# Altium PCB PolarizacionBJT_2.PcbDoc
Units mm, origin at the board's own origin, x right, y up, seen from the top; angles counter-clockwise.
Board outline 100 x 100 mm, 2 copper layers (Top Layer, Bottom Layer); 20 components, 7 nets, 43 pads, 0 vias.
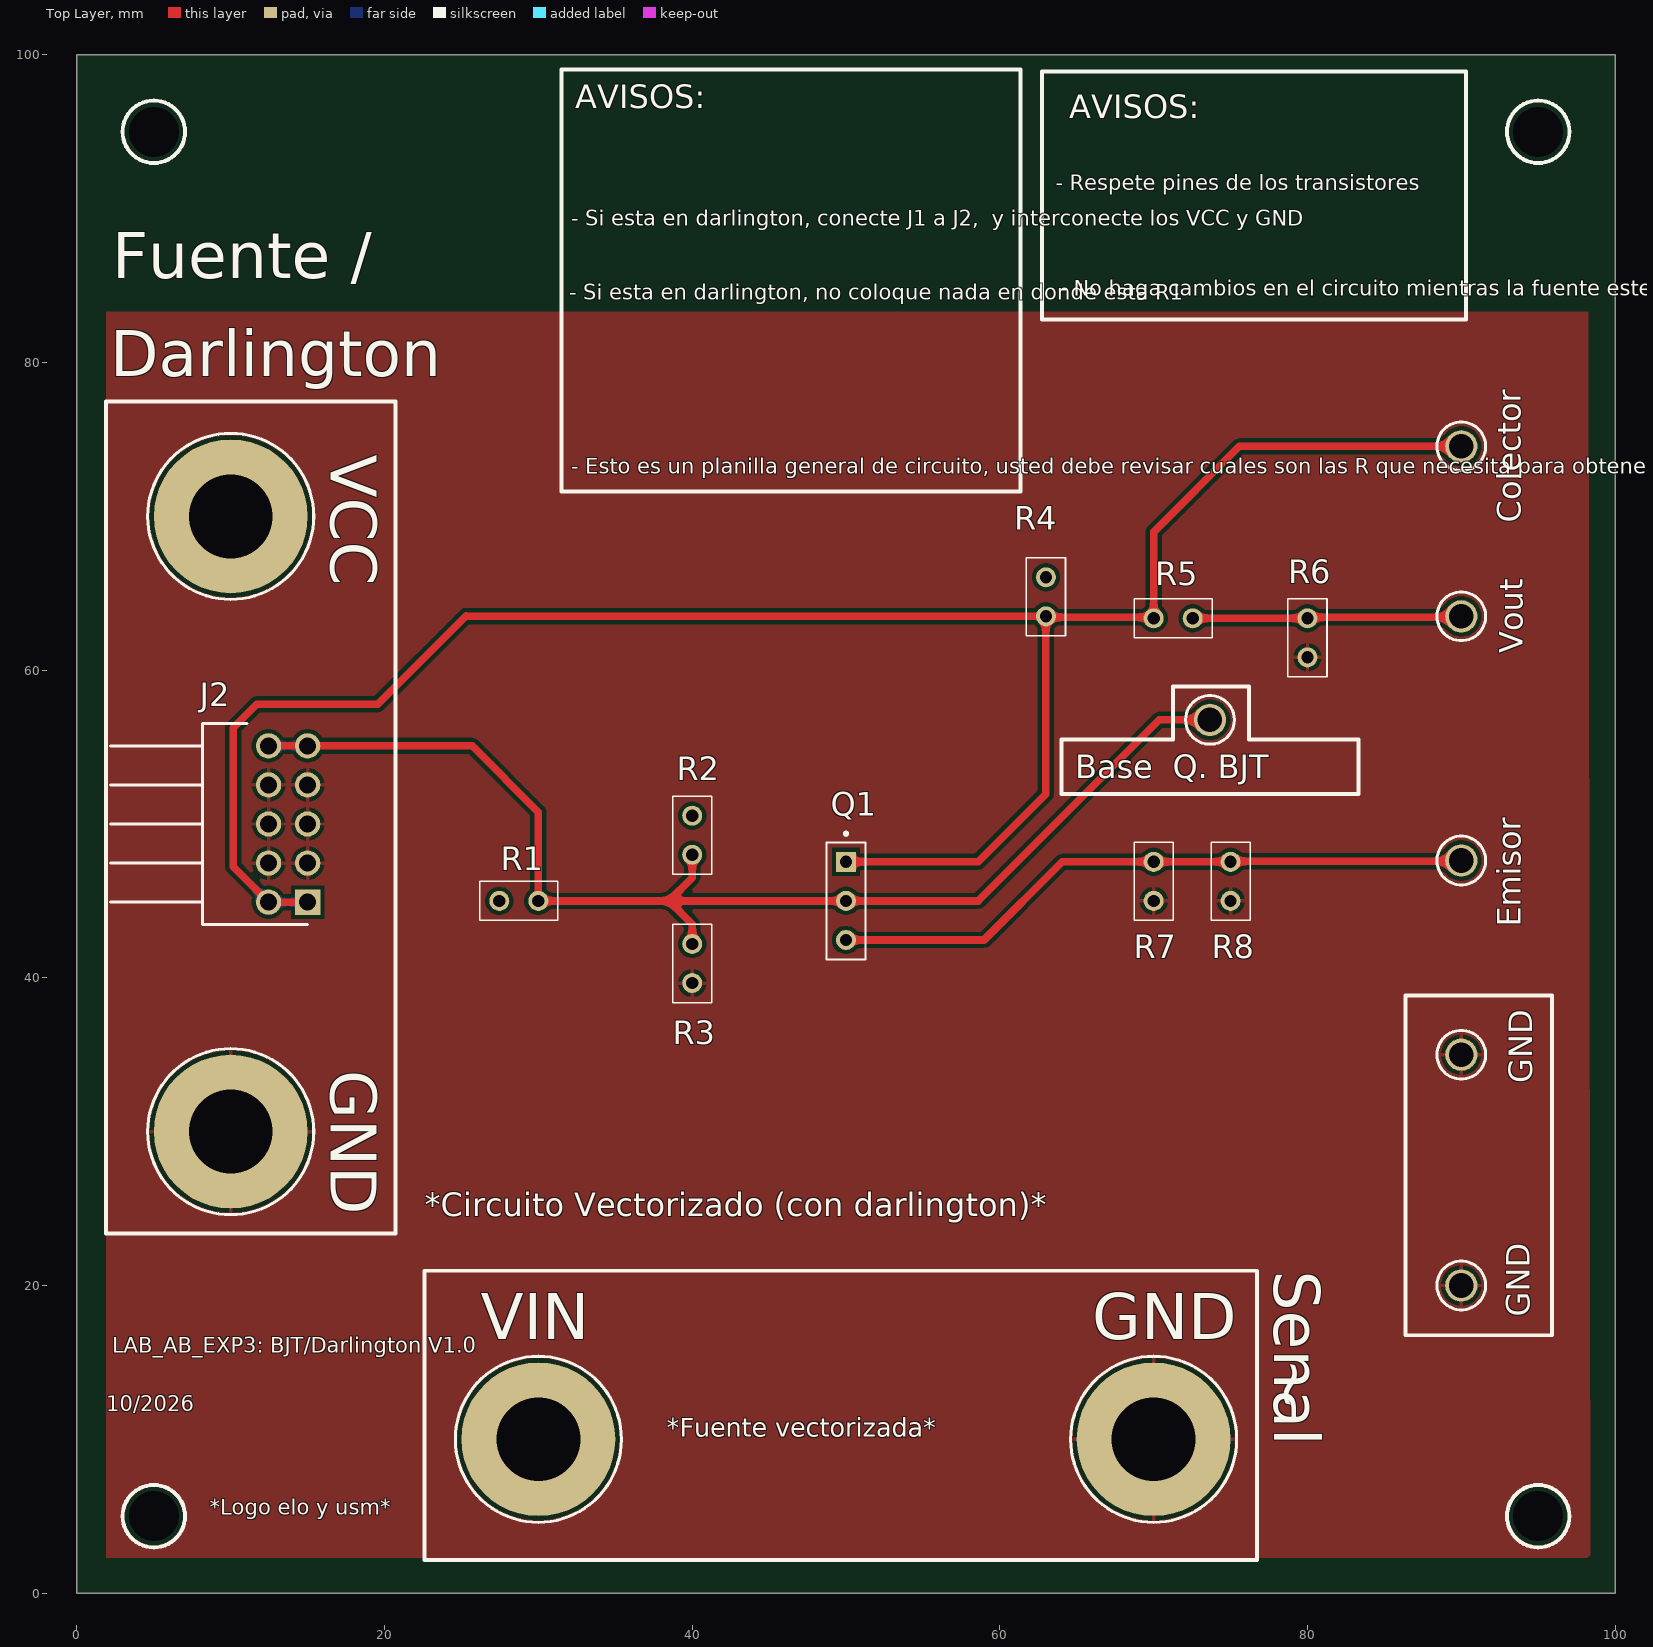
[diagram p0: Top Layer view]
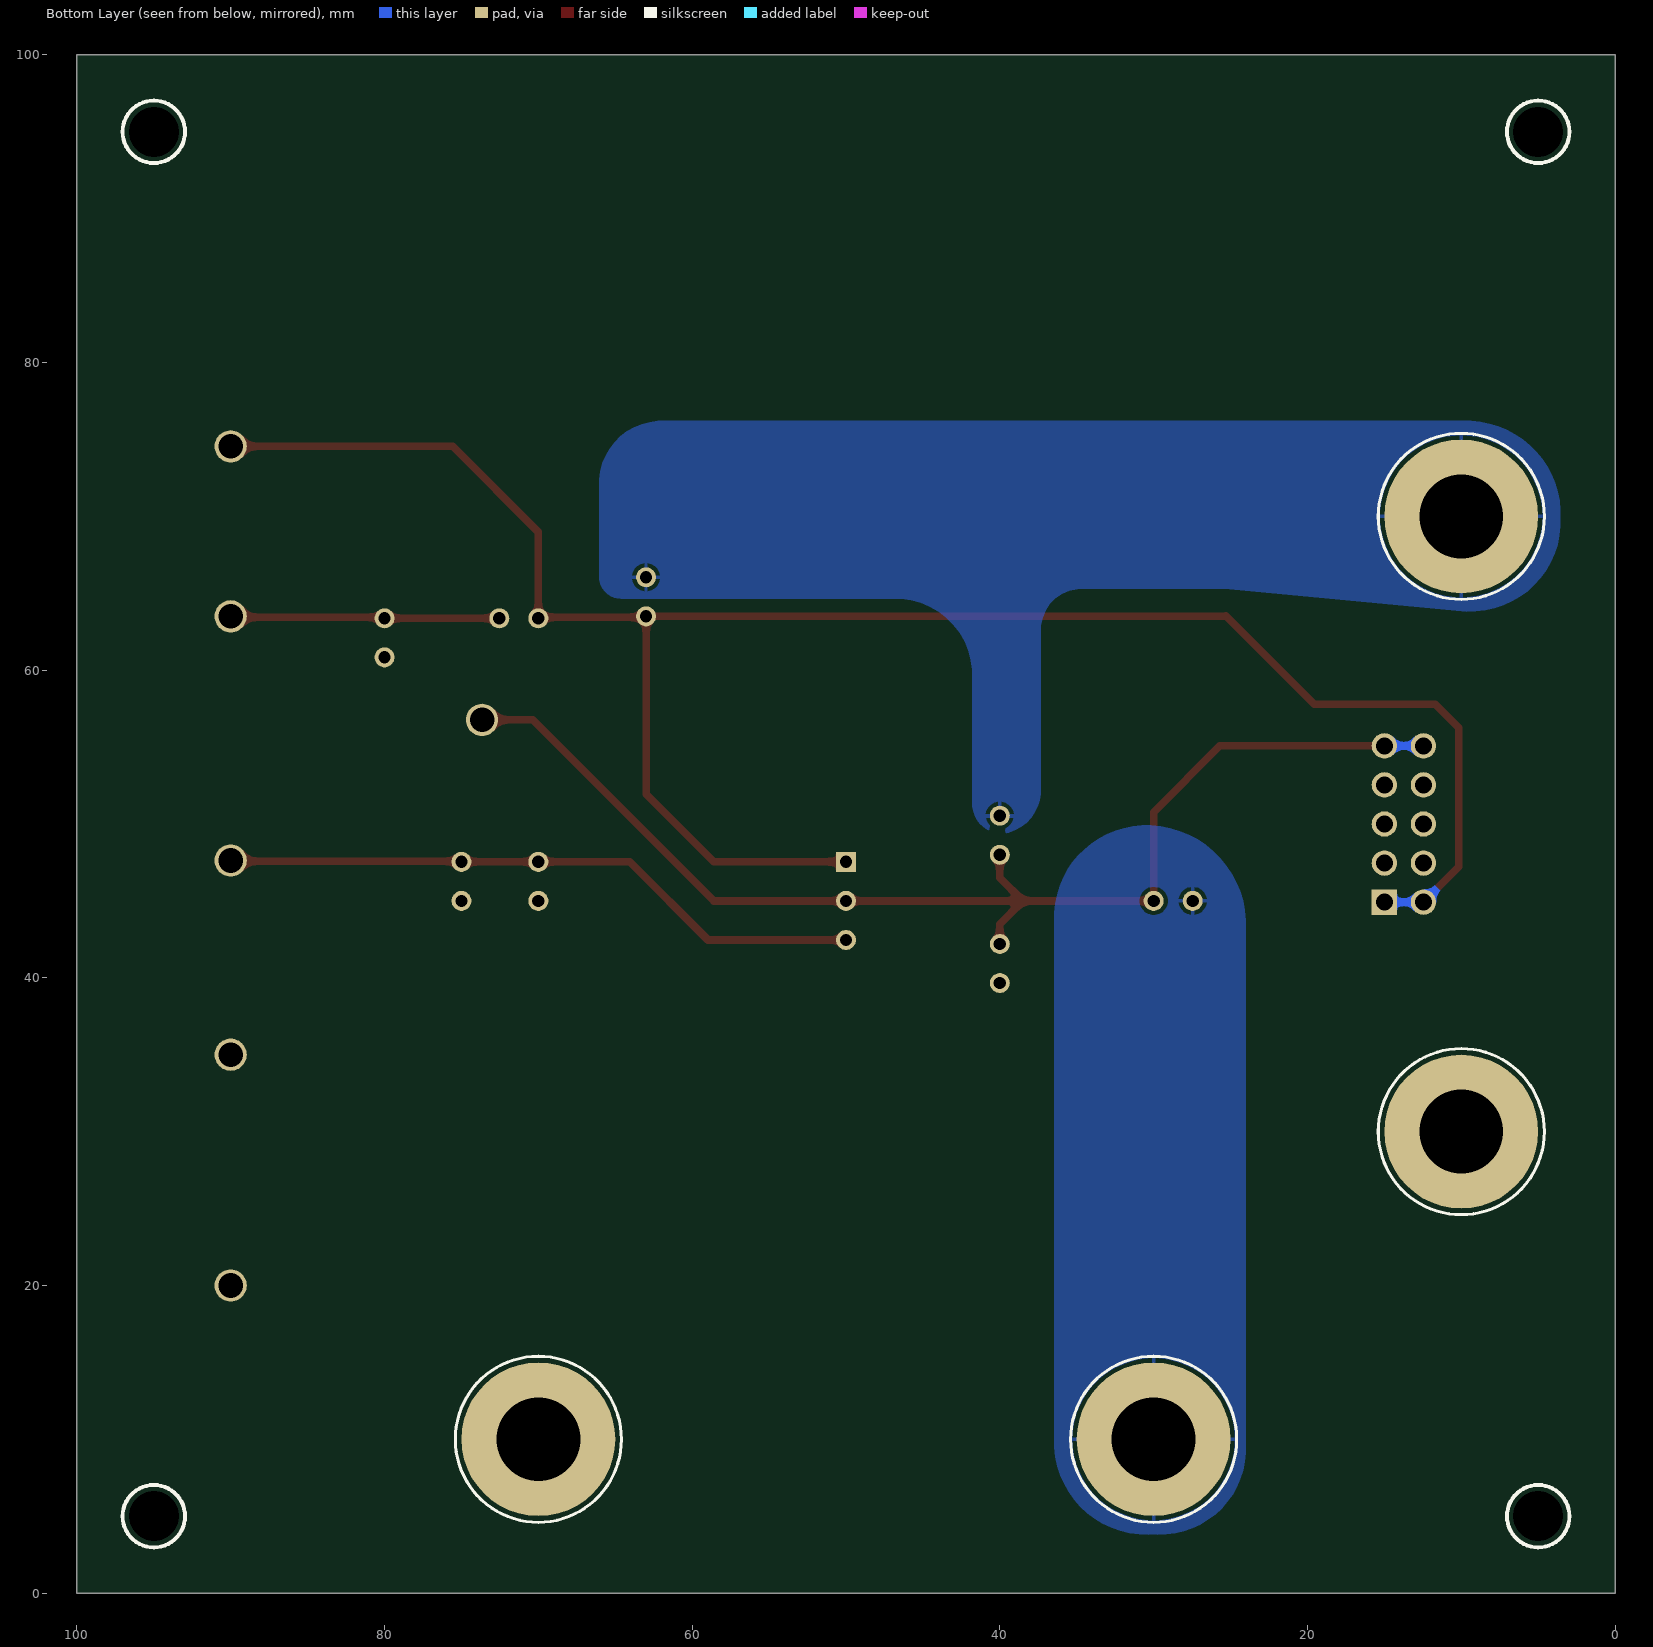
[diagram p1: Bottom Layer view, seen from below]
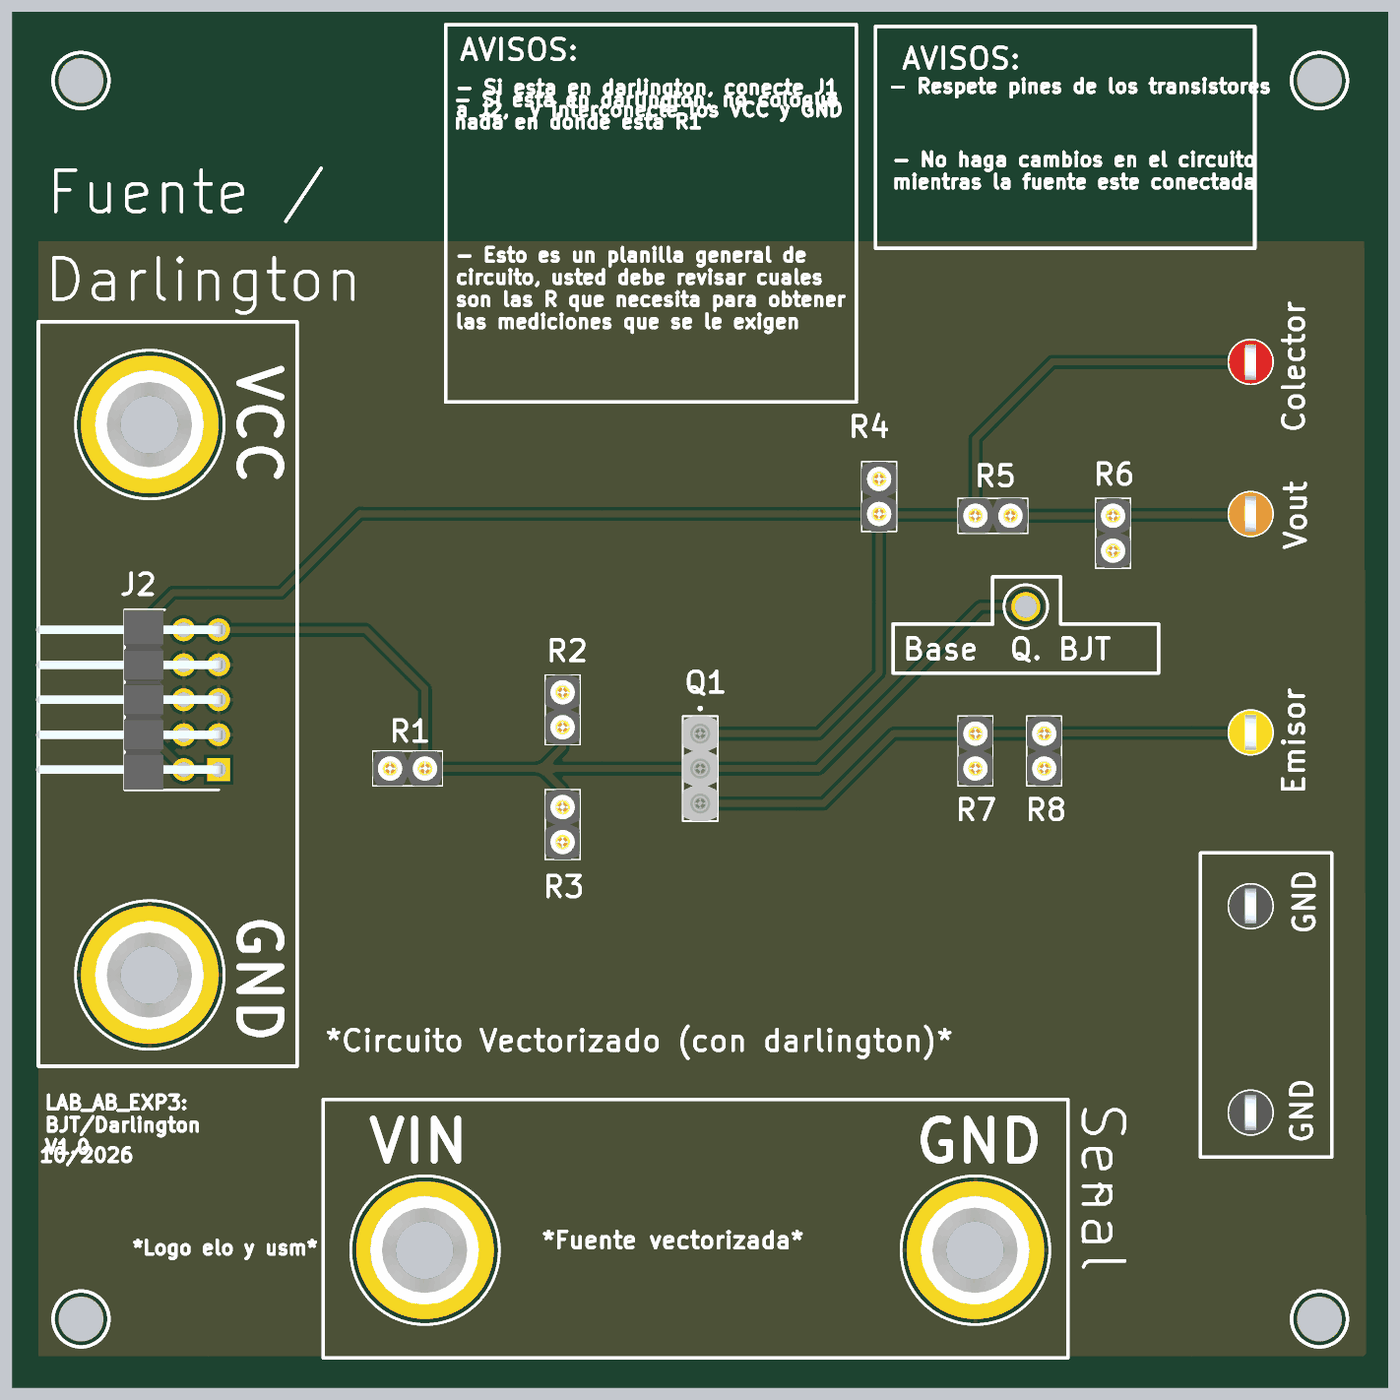
[diagram p2: 3D render of the assembled board from above, using the file's embedded part models]

## Layer stack, top to bottom
Top Solder: solder mask 0.0102, Solder Resist, Dk 3.5
Top Layer: signal copper 0.0356
Dielectric 1: dielectric 0.32, FR-4, Dk 4.8
Bottom Layer: signal copper 0.0356
Bottom Solder: solder mask 0.0102, Solder Resist, Dk 3.5

## Board outline
0,0 0,100 100,100 100,0

## Design rules (kind name [scope] priority, off if disabled: settings)
Clearance [All] p1: gap=0.254 ignorepadtopadclearanceinfootprint=FALSE
HoleSize [All] p1: absolutevalues=TRUE maxlimit=7 minlimit=0.025 maxpercent=80.000 minpercent=20.000
PolygonConnect [All] p1: connectstyle=Relief reliefconductorwidth=0.254 reliefentries=4 polygonreliefangle="90 Angle" airgapwidth=0.254
RoutingVias [All] p1: holewidth=0.711 width=1.27 viastyle="Through Hole" minholewidth=0.711 minwidth=1.27 maxholewidth=0.711 maxwidth=1.27
SolderMaskExpansion [All] p1: expansion=0 istentingtop=FALSE
SupplyNets "Schematic Supply Nets_2" [InNet('GND')] p1: voltage=0.000
SupplyNets "Schematic Supply Nets_1" [InNet('VCC')] p2: voltage=0.000
SupplyNets "Schematic Supply Nets" [InNet('Vs')] p3: voltage=0.000
Width [All] p1: maxlimit=0.7 minlimit=0.254 preferedwidth=0.254
29 further rules are at their usual default settings.

## Components (designator, comment, footprint, x,y, rotation, side; value= is the part's Value field where it differs from the comment)
"Base  Q. BJT" "5012" KSTN-5012_V 73.66,56.769 r180 top (schematic designator TP10)
Colector "5010" KSTN-5010_V 90,74.549 r90 top (schematic designator TP5)
Emisor "5014" KSTN-5014_V 90,47.625 r270 top (schematic designator TP7)
GND "5011" KSTN-5011_V 90,35 r90 top (schematic designator TP49)
GND "5011" KSTN-5011_V 90,20 r270 top (schematic designator TP9)
GND "575-4" KSTN-575-4 70,10 r0 top (schematic designator TP4)
GND "575-4" KSTN-575-4 10,30 r0 top locked (schematic designator TP2)
J2 "PH2RA-10-UA" HDRRA10W64P254_2X5_1270X250X538P 15,44.92 r90 top locked (schematic designator J32)
Q1 "D01-9970342" HARWIN_D01-9970342 50,45 r90 top (schematic designator J12)
R1 "D01-9970242" D019970242 30,45 r0 top (schematic designator J4)
R2 "D01-9970242" D019970242 40,48 r270 top (schematic designator J8)
R3 "D01-9970242" D019970242 40,42.2 r90 top (schematic designator J9)
R4 "D01-9970242" D019970242 63,63.5 r270 top locked (schematic designator J1)
R5 "D01-9970242" D019970242 70,63.373 r180 top (schematic designator J2)
R6 "D01-9970242" D019970242 80,60.833 r270 top (schematic designator J3)
R7 "D01-9970242" D019970242 70,45 r270 top (schematic designator J6)
R8 "D01-9970242" D019970242 75,45 r270 top (schematic designator J7)
VCC "575-4" KSTN-575-4 10,70 r0 top locked (schematic designator TP3)
VIN "575-4" KSTN-575-4 30,10 r0 top (schematic designator TP1)
Vout "5013" KSTN-5013_V 90,63.5 r270 top (schematic designator TP8)

## Footprints (in the part's own frame and the unit in brackets; to place one, negate y for a bottom-side part, rotate by r counter-clockwise, add the part's x,y. Pads: shape width x height; smd on the part's side, far side on the other; paste and mask are expansions set on the pad)
D019970242 [mm]
  round 1.3 hole 0.8: 1(0,0) 2(-2.54,0)
  silkscreen extent -3.81,-1.27 1.27,1.27, body extent -3.81,-1.27 1.27,1.27, height 4.22
HARWIN_D01-9970342 [mm]
  rect 1.308x1.308 / inner round 1.308 / far side rect 1.308x1.308 hole 0.8: 1(2.54,0)
  round 1.308 hole 0.8: 2(0,0) 3(-2.54,0)
  silkscreen extent -3.81,-1.27 4.47,1.27, body extent -3.81,-1.27 3.81,1.27, height 4.22
HDRRA10W64P254_2X5_1270X250X538P [mm]
  rect 1.65x1.65 / inner round 1.65 / far side rect 1.65x1.65 hole 1.1: 1(0,0)
  round 1.65 hole 1.1: 2(0,2.54) 3(2.54,0) 4(2.54,2.54) 5(5.08,0) 6(5.08,2.54) 7(7.62,0) 8(7.62,2.54) 9(10.16,0) 10(10.16,2.54)
  silkscreen extent -1.46,0 11.62,12.82, body extent -1.46,-0.25 11.62,13.27, height 5.38
KSTN-575-4 [mm] "Banana Jack, Non-Insulated, Dia 7.92mm"
  round 10 hole 5.45: 1(0,0)
  silkscreen extent -5.4,-5.4 5.4,5.4, body extent -3.98,-3.96 3.92,3.94, height 2.36
KSTN-5010_V [mm] "Test Point, Dia 3.17mm"
  round 2.1 hole 1.6: 1(0,0)
  silkscreen extent -1.58,-1.59 1.58,1.59, body extent -1.59,-1.59 1.59,1.59, height 8.13
KSTN-5011_V [mm] "Test Point, Dia 3.17mm"
  round 2.1 hole 1.6: 1(0,0)
  silkscreen extent -1.58,-1.59 1.58,1.59, body extent -1.59,-1.59 1.59,1.59, height 8.13
KSTN-5012_V [mm] "Test Point, Dia 3.17mm"
  round 2.1 hole 1.6: 1(0,0)
  silkscreen extent -1.59,-1.58 1.59,1.58, body extent -1.59,-1.59 1.59,1.59, height 8.13
KSTN-5013_V [mm] "Test Point, Dia 3.17mm"
  round 2.1 hole 1.6: 1(0,0)
  silkscreen extent -1.58,-1.59 1.58,1.59, body extent -1.59,-1.59 1.59,1.59, height 8.13
KSTN-5014_V [mm] "Test Point, Dia 3.17mm"
  round 2.1 hole 1.6: 1(0,0)
  silkscreen extent -1.58,-1.59 1.58,1.59, body extent -1.59,-1.59 1.59,1.59, height 8.13

## Part data
"Base  Q. BJT": library part CMP-1672-00004-4, "Test Point, White, Through Hole, RoHS, Bulk", Colour=White, Manufacturer=Keystone, Package Quantity=100, ComponentLink1Description="Manufacturer URL", ComponentLink1URL=http://www.keyelco.com/, ComponentLink2Description=Datasheet, ComponentLink2URL=http://www.keyelco.com/product-pdf.cfm?p=1321, Contact Material=Bronze, Contact Plating=Silver, DatasheetVersion="Rev. F, 12/2013", Height="8.12 mm", Length="11.3 mm", Mount="Through Hole", Mounting Technology="Through Hole", PackageDescription="1-Pin Through Hole Device, Dia 3.17 mm", PackageReference=5012, Packaging=Bulk, Pins=1, REACH SVHC="No SVHC", RoHSCompliant=true
Colector: library part CMP-1672-00002-4, "Test Point, Red, Through Hole, RoHS, Bulk", Colour=Red, Manufacturer=Keystone, Package Quantity=100, ComponentLink1Description="Manufacturer URL", ComponentLink1URL=http://www.keyelco.com/, ComponentLink2Description=Datasheet, ComponentLink2URL=http://www.keyelco.com/product-pdf.cfm?p=1319, Contact Material=Bronze, Contact Plating=Silver, DatasheetVersion="Rev. F, 12/2013", Height="8.12 mm", Mount="Through Hole", Mounting Technology="Through Hole", PackageDescription="1-Pin Through Hole Device, Dia 3.17 mm", PackageReference=5010, Packaging=Bulk, Pins=1, REACH SVHC="No SVHC", RoHSCompliant=true
Emisor: library part CMP-1672-00006-4, "Test Point, Yellow, Through Hole, RoHS, Bulk", Colour=Yellow, Manufacturer=Keystone, Package Quantity=100, ComponentLink1Description="Manufacturer URL", ComponentLink1URL=http://www.keyelco.com/, ComponentLink2Description=Datasheet, ComponentLink2URL=http://www.keyelco.com/product-pdf.cfm?p=1323, Contact Material=Bronze, Contact Plating=Silver, DatasheetVersion="Rev. F, 12/2013", Height="8.12 mm", Mount="Through Hole", Mounting Technology="Through Hole", PackageDescription="1-Pin Through Hole Device, Dia 3.17 mm", PackageReference=5014, Packaging=Bulk, REACH SVHC="No SVHC", RoHSCompliant=true
GND GND: library part CMP-1672-00003-4, "Test Point, Black, Through Hole, RoHS, Bulk", Colour=Black, Manufacturer=Keystone, Package Quantity=100, ComponentLink1Description="Manufacturer URL", ComponentLink1URL=http://www.keyelco.com/, ComponentLink2Description=Datasheet, ComponentLink2URL=http://www.keyelco.com/product-pdf.cfm?p=1320, Contact Material=Bronze, Contact Plating=Silver, DatasheetVersion="Rev. F, 12/2013", Height="8.12 mm", Mount="Through Hole", Mounting Technology="Through Hole", PackageDescription="1-Pin Through Hole Device, Dia 3.17 mm", PackageReference=5011, Packaging=Bulk, Pins=1, REACH SVHC="No SVHC", RoHSCompliant=true
GND GND VCC VIN: library part CMP-2000-05649-1, "Banana Jack, Non-Insulated, 1-Pin THD, RoHS, Bulk", Color=-, Manufacturer=Keystone-Electronics, Package Description="1-Pin Through Hole Device, Dia 7.92 mm", Package Version="Rev. B, 11/1994", Body Material=-, Category=Connectors,Interconnects, Contact Finish=Nickel, Contact Material=Brass, Datasheet URL=http://www.keyelco.com/product-pdf.cfm?p=2379, Datasheet Version="Rev. B, 11/1994", Family=BananaandTipConnectors-Jacks,Plugs, Features=-, Gender=Female, Insulation=Non-Insulated, Manufacturer URL=http://www.keyelco.com/, Mounting Technology=ThroughHole, Mounting Type=ThroughHole, Operating Temperature=-, Package Reference=575-4, Package URL=http://www.keyelco.com/product-pdf.cfm?p=2379, Packaging=Bulk, Plug/Mating Plug Diameter=StandardBanana, Series=-, Termination=Solder, Type=BananaJack, Wire Gauge=-
J2: "CONN HEADER R/A 10POS 2.54MM", Manufacturer_Name="Adam Tech", Mouser Part Number=737-PH2RA-10-UA, Datasheet Link=https://app.adam-tech.com/products/download/data_sheet/200508/ph2ra-xx-ua-data-sheet.pdf, Geometry.Height=5.381mm, Manufacturer_Part_Number=PH2RA-10-UA, Mouser Price/Stock=https://www.mouser.co.uk/ProductDetail/Adam-Tech/PH2RA-10-UA?qs=HoCaDK9Nz5eXic%252Bmj6sc5g%3D%3D
Q1: Package=None, Availability=Unavailable, MP=D01-9970342, Price=None
R1 R2 R3 R4 R5 R6 R7 R8: "IC Socket: 2 Pos Receptacle SIL Straight THT Strip", Manufacturer_Name=Harwin, Mouser Part Number=855-D01-9970242, Datasheet Link=https://content.harwin.com/m/e0b6c35948424a73/original/DRG-00097-Technical-Drawing-Datasheet-D01-997-pdf.pdf, Geometry.Height=4.2mm, Manufacturer_Part_Number=D01-9970242, Mouser Price/Stock=https://www.mouser.co.uk/ProductDetail/Harwin/D01-9970242?qs=TpUtqFO9vU%252Bf37OJ5TYoTQ%3D%3D
Vout: library part CMP-1672-00005-4, "Test Point, Orange, Through Hole, RoHS, Bulk", Colour=Orange, Manufacturer=Keystone, Package Quantity=100, ComponentLink1Description="Manufacturer URL", ComponentLink1URL=http://www.keyelco.com/, ComponentLink2Description=Datasheet, ComponentLink2URL=http://www.keyelco.com/product-pdf.cfm?p=1322, Contact Material=Bronze, Contact Plating=Silver, DatasheetVersion="Rev. F, 12/2013", Height="8.12 mm", Mount="Through Hole", Mounting Technology="Through Hole", PackageDescription="1-Pin Through Hole Device, Dia 3.17 mm", PackageReference=5013, Packaging=Bulk, REACH SVHC="No SVHC", RoHSCompliant=True

## Free pads (board coordinates)
  round 0 hole 3.25: 10(5,5) 10(5,95) 10(95,5) 10(95,95)

## Nets (pads, with @x,y where several pads share a name; then routed paths per layer and width w, separated by ;. In a path a pad name is that pad's centre, name@x,y a point inside that pad or via, vN(x,y) a via of type N, cw(c..) or ccw(c..) an arc to the next point about the centre after c; other vN are vias at no path point)
Base: "Base  Q. BJT.1" J2.9 J2.10 Q1.2 R1.1 R2.1 R3.1 | length 80.7
  Top Layer w0.5: J2.10 J2.9 25.692,55.08 30,50.772 R1.1 38.481,45 ; R3.1 40,43.481 38.481,45 ; R2.1 40,46.519 38.481,45 ; 73.66,56.769 70.358,56.769 58.589,45 Q1.2 38.481,45
Colector: Colector.1 J2.1 J2.2 Q1.1 R4.1 R5.1 | length 131.9
  Top Layer w0.254: R4.1 R4.1@63.064,63.436
  Top Layer w0.5: J2.1 J2.2 10.16,47.22 10.16,56.261 11.684,57.785 19.558,57.785 25.313,63.54 ; 25.372,63.5 R4.1 ; Q1.1 58.589,47.54 62.992,51.943 R4.1@62.992,63.5 ; R4.1@63.064,63.436 R5.1@69.936,63.436 ; R5.1 70,68.984 75.565,74.549 Colector.1
Emisor: Emisor.1 Q1.3 R7.2 R8.2 | length 42.1
  Top Layer w0.254: R8.2 R8.2@75.043,47.583 ; Emisor.1@89.958,47.583 Emisor.1
  Top Layer w0.5: Q1.3 58.97,42.46 64.05,47.54 R7.2 R8.2 ; R8.2@75.043,47.583 Emisor.1@89.958,47.583
GND: GND.1 J2.3 J2.4 J2.5 J2.6 J2.7 J2.8 R3.2 R6.1 R7.1 R8.1
Load: R5.2 R6.2 Vout.1 | length 17.5
  Top Layer w0.254: R6.2 R6.2@80.064,63.436 ; Vout.1@89.937,63.436 Vout.1
  Top Layer w0.5: R5.2 R6.2 ; R6.2@80.064,63.436 Vout.1@89.937,63.436
VCC: R2.2 R4.2 VCC.1
Vs: R1.2 VIN.1

## Polygon pours and split planes (outlines as drawn)
VCC on Bottom Layer "VCC_L02_P001" (solid, pour order 1): 9.652,76.2 61.976,76.2 cw(c61.976,72.136) 66.04,72.136 66.04,66.04 cw(c64.643,66.04) 64.643,64.643 46.736,64.643 ccw(c46.736,59.69) 41.783,59.69 41.783,51.308 cw(c39.866,51.308) 39.179,49.518 cw(c40.207,52.197) 37.338,52.197 37.338,62.662 ccw(c34.722,62.662) 34.722,65.278 25.4,65.278 9.958,63.842 cw(c9.416,69.676) 3.556,69.676 3.556,70.104 cw(c9.652,70.104)
Vs on Bottom Layer "VS_L02_P000" (solid, pour order 0): 36.449,9.779 36.449,43.942 ccw(c30.48,43.942) 30.48,49.911 ccw(c30.48,43.434) 24.003,43.434 24.003,9.398 ccw(c29.591,9.398) 30.028,3.827 ccw(c30.48,9.779)
GND on Top Layer "GND_L01_P002" (solid, pour order 2): 1.905,83.312 98.257,83.312 98.381,2.286 1.905,2.286

## Silkscreen, mask and mechanical layers (free items; w line width, h text height)
Top Overlay:
  circle w0.254: c5,95 r2.031
  circle w0.254: c5,5 r2.031
  circle w0.254: c95,5 r2.031
  circle w0.254: c95,95 r2.031
  lines w0.254: 1.905,23.368 20.701,23.368 20.701,77.47 1.905,77.47 1.905,23.368 ; 22.606,2.159 22.606,20.955 76.708,20.955 76.708,2.159 22.606,2.159 ; 31.496,71.628 61.341,71.628 61.341,99.06 31.496,99.06 31.496,71.628 ; 62.738,82.804 90.297,82.804 90.297,98.933 62.738,98.933 62.738,82.804 ; 64.008,51.943 83.312,51.943 83.312,55.499 76.2,55.499 76.2,58.928 71.247,58.928 71.247,55.499 64.008,55.499 64.008,51.943 ; 86.36,16.764 95.885,16.764 95.885,38.862 86.36,38.862 86.36,16.764
  text "AVISOS:" at 32.385,96.52 h1.52
  text "AVISOS:" at 64.516,95.885 h1.52
  text "- Respete pines de los transistores" at 63.627,91.186 h1
  text "- Si esta en darlington, conecte J1 a J2,  y interconecte los VCC y GND" at 32.131,88.9 h1
  text "Fuente /" at 2.286,85.471 h3
  text "- No haga cambios en el circuito mientras la fuente este conectada" at 63.881,84.328 h1
  text "- Si esta en darlington, no coloque nada en donde esta R1" at 32.004,84.074 h1
  text "Darlington" at 2.159,79.105 h3
  text "- Esto es un planilla general de circuito, usted debe revisar cuales son las R que necesita para obtener las mediciones que se le exigen" at 32.131,72.771 h1
  text "*Circuito Vectorizado (con darlington)*" at 22.606,24.511 h1.52
  text "Senal" at 77.835,20.955 h3 r270
  text "LAB_AB_EXP3: BJT/Darlington V1.0" at 2.286,15.621 h1
  text "~" at 78.022,15.517 h3 r256.5
  text "10/2026" at 1.905,11.811 h1
  text "*Fuente vectorizada*" at 38.354,10.16 h1.2
  text "*Logo elo y usm*" at 8.636,5.08 h1
Bottom Overlay:
  circle w0.254: c5,95 r2.031
  circle w0.254: c5,5 r2.031
  circle w0.254: c95,5 r2.031
  circle w0.254: c95,95 r2.031
Mechanical 1:
  lines w0.254: 100,0 100,0.102